# Altium PCB PCB1.PcbDoc
Units mil, origin at the board's own origin, x right, y up, seen from the top; angles counter-clockwise.
Board outline 6000 x 4000 mil, 2 copper layers (Top Layer, Bottom Layer); 25 components, 35 nets, 133 pads, 0 vias.
Unrouted connection lines stored in the file: 61.
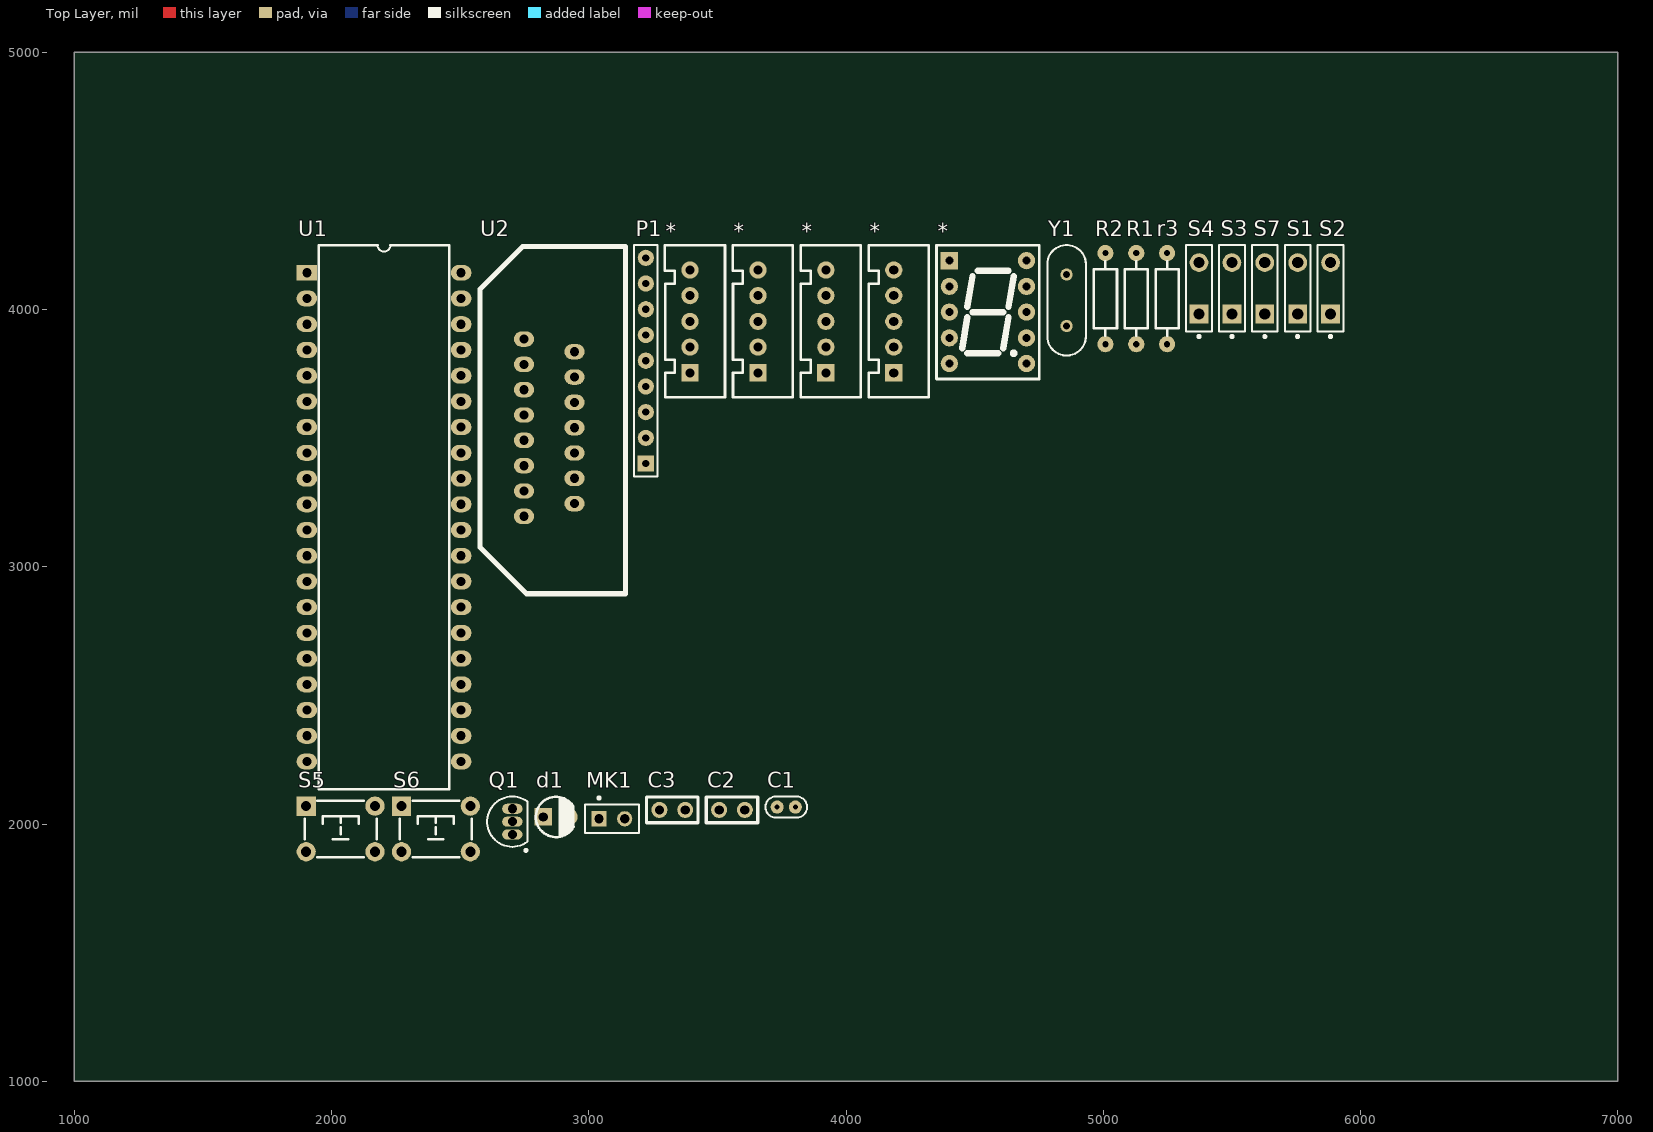
[diagram p0: Top Layer view]
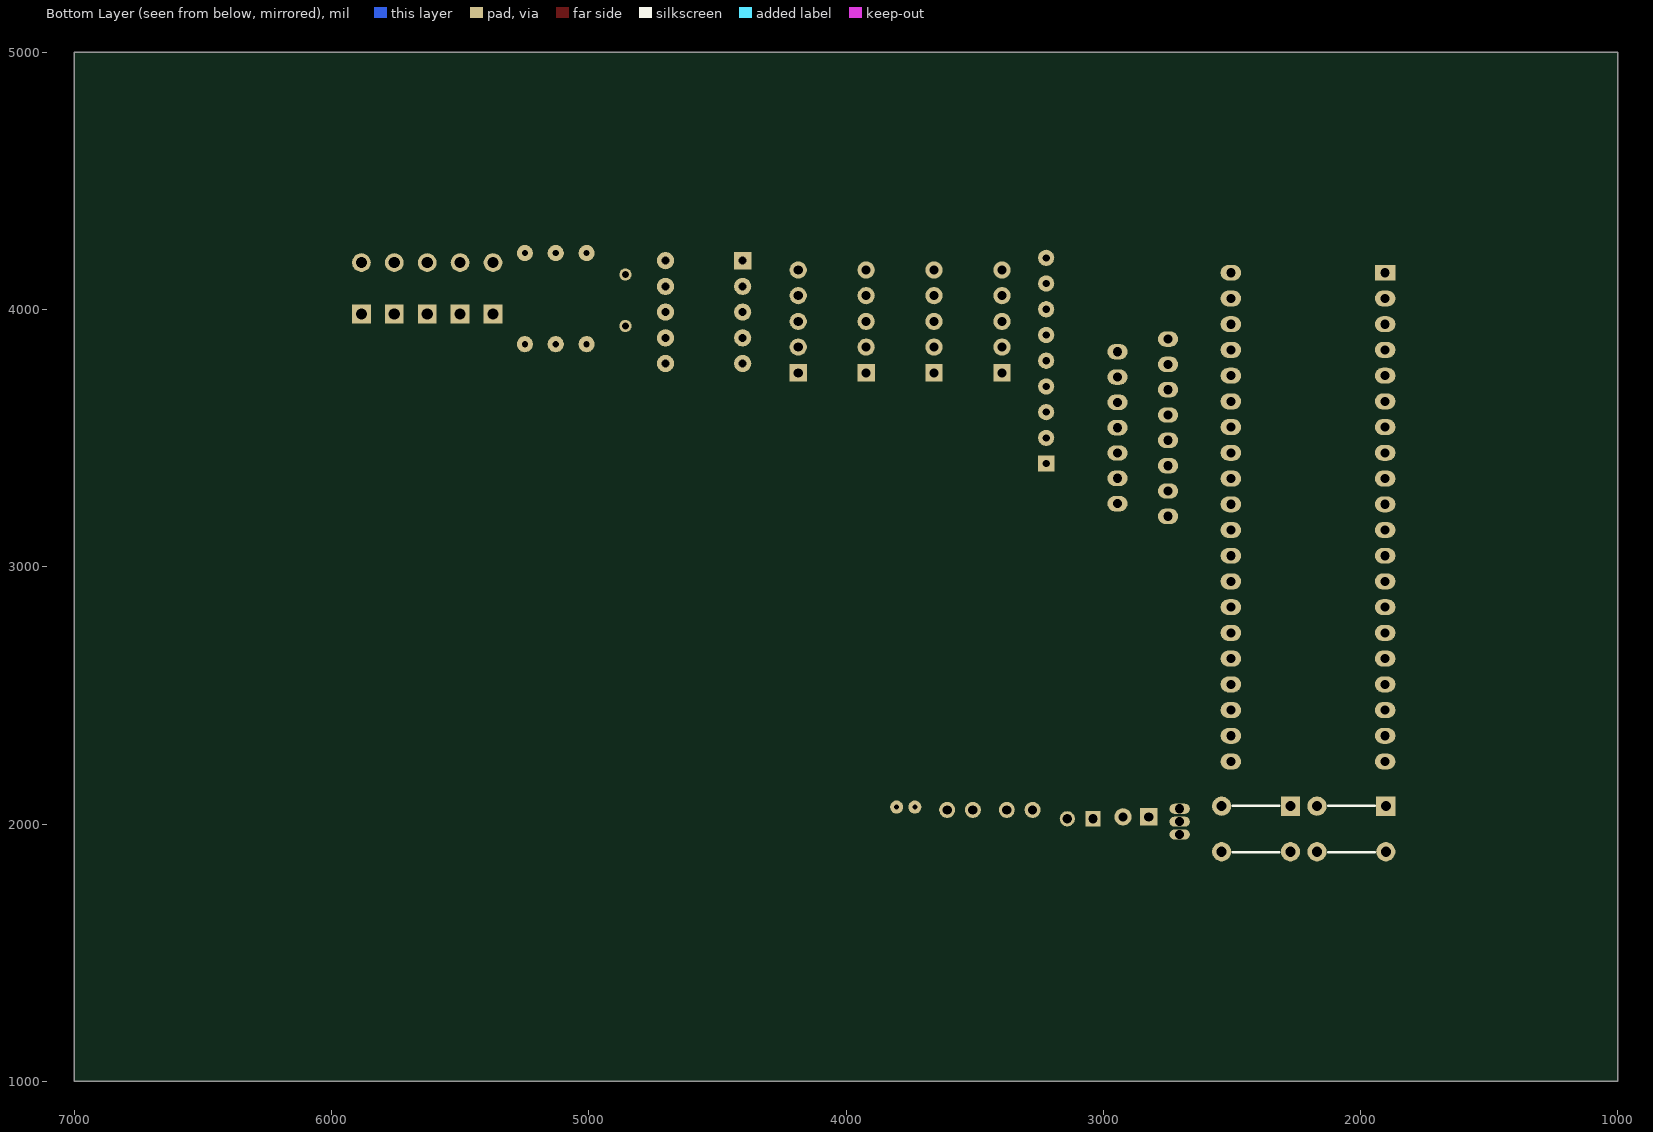
[diagram p1: Bottom Layer view, seen from below]

## Layer stack, top to bottom
Top Solder: solder mask 0.4, Solder Resist, Dk 3.5
Top Layer: signal copper 1.4
Dielectric 1: dielectric 12.6, FR-4, Dk 4.8
Bottom Layer: signal copper 1.4
Bottom Solder: solder mask 0.4, Solder Resist, Dk 3.5

## Board outline
1000,1000 7000,1000 7000,5000 1000,5000

## Design rules (kind name [scope] priority, off if disabled: settings)
Clearance [All] p1: gap=10 ignorepadtopadclearanceinfootprint=FALSE except(0: Arc-Hole Track-Hole SMDPad-Hole THPad-Hole Via-Hole Fill-Hole Poly-Hole Region-Hole Text-Hole)
PolygonConnect [All] p1: connectstyle=Relief reliefconductorwidth=10 reliefentries=4 polygonreliefangle="90 Angle" airgapwidth=10
RoutingVias [All] p1: holewidth=28 width=50 viastyle="Through Hole" minholewidth=28 minwidth=50 maxholewidth=28 maxwidth=50
SolderMaskExpansion [All] p1: expansion=4
Width [All] p1: maxlimit=10 minlimit=10 preferedwidth=10
30 further rules are at their usual default settings.

## Classes and differential pairs
component class 原理图: * C1 C2 C3 d1 MK1 P1 Q1 R1 R2 r3 S1 S2 S3 S4 S5 S6 S7 U1 U2 Y1

## Components (designator, comment, footprint, x,y, rotation, side; value= is the part's Value field where it differs from the comment)
* "METER" XH2.54-LI-5P 3657.68,3953.94 r90 top
* "METER" XH2.54-LI-5P 3393.68,3953.94 r90 top
* "METER" XH2.54-LI-5P 3921.68,3953.94 r90 top
* "LCD" "SMG 0.39-1P" 4551.69,3990 r0 top
* "METER" XH2.54-LI-5P 4185.69,3953.94 r90 top
C1 "Cap Pol1" "CC 1.8*3.6" 3767.74,2065.89 r0 top value=100pF
C2 "30PF" RAD0.1 3506.8,2054.83 r0 top
C3 "30PF" RAD0.1 3274.8,2054.83 r0 top
d1 "led" "LED 3MM-G" 2873.23,2027.88 r0 top
MK1 "Mic1" PIN2 3039.75,2020.27 r0 top
P1 "Header 9" "R SIP9-2.54" 3221.68,3801 r90 top
Q1 "2N3906" TO-92A 2702.77,2009.09 r0 top
R1 "Res2" AXIAL0.4-1/4W 5128.42,4042.34 r90 top value=1K
R2 "Res2" AXIAL0.4-1/4W 5008.42,4042.34 r90 top value=1K
r3 "res" AXIAL0.4-1/4W 5248.42,4042.34 r90 top
S1 "SW-SPST" SPST-2 5755.98,4082.56 r90 top
S2 "SW-SPST" SPST-2 5883.85,4082.56 r90 top
S3 "SW-SPST" SPST-2 5500.23,4082.56 r90 top
S4 "SW-SPST" SPST-2 5372.35,4082.56 r90 top
S5 "4Switch" "TSW DIP-6*6*5" 2035.26,1980.84 r0 top
S6 "4Switch" "TSW DIP-6*6*5" 2405.78,1980.84 r0 top
S7 "SW-SPST" SPST-2 5628.1,4082.56 r90 top
U1 "AT89C52/S52" DIP-40 2208,3117.91 r0 top
U2 "L298" "PCBComponent_1 - duplicate" 2747.84,3885.16 r0 top
Y1 "12MHz" XTAL 4857.55,4036 r90 top

## Footprints (in the part's own frame and the unit in brackets; to place one, negate y for a bottom-side part, rotate by r counter-clockwise, add the part's x,y. Pads: shape width x height; smd on the part's side, far side on the other; paste and mask are expansions set on the pad)
AXIAL0.4-1/4W [mm] "脚距9mm，直径2.3mm        淘宝ID:黄晶宝石"
  round 1.6 hole 0.6: 1(-4.5,0) 2(4.5,0)
  silkscreen extent -3.68,-1.14 3.68,1.14, body extent -4.72,-1.16 4.73,1.16, height 2.32
"CC 1.8*3.6" [mm] "脚距1.8mm直径3.6mm      淘宝ID:黄晶宝石"
  round 1.3 hole 0.5: 1(-0.9,0) 2(0.9,0)
  silkscreen extent -2.05,-1.04 2.05,1.04, body extent -1.8,-0.8 1.8,0.8, height 3.6
DIP-40 [mil] "淘宝ID:黄晶宝石   店铺网址:https://shop463601444.taobao.com"
  rect 80x62 hole 35.43: 1(-304,1025)
  oval 80x62 hole 35.43: 2(-304,925) 3(-304,825) 4(-304,725) 5(-304,625) 6(-304,525) 7(-304,425) 8(-304,325) 9(-304,225) 10(-304,125) 11(-304,25) 12(-304,-75) 13(-304,-175) 14(-304,-275) 15(-304,-375) 16(-304,-475) 17(-304,-575) 18(-304,-675) 19(-304,-775) 20(-304,-875) 21(296,-875) 22(296,-775) 23(296,-675) 24(296,-575) 25(296,-475) 26(296,-375) 27(296,-275) 28(296,-175) 29(296,-75) 30(296,25) 31(296,125) 32(296,225) 33(296,325) 34(296,425) 35(296,525) 36(296,625) 37(296,725) 38(296,825) 39(296,925) 40(296,1025)
  silkscreen extent -258,-982 250,1132, body extent -306,-944 304,1120, height 224
"LED 3MM-G" [mm] "绿色3mm直插LED                                 淘宝ID:黄晶宝石"
  rect 1.7x1.7 hole 0.9: 1(-1.27,0)
  round 1.7 hole 0.9: 2(1.27,0)
  silkscreen extent -2.01,-2 1.72,1.98, body extent -1.95,-1.95 1.64,1.95, height 5.55
"PCBComponent_1 - duplicate" [mm]
  oval 2x1.524 hole 0.91: 0(0,0) 1(5,-1.25) 2(0,-2.5) 3(5,-3.75) 4(0,-5) 5(5,-6.25) 6(0,-7.5) 7(5,-8.75) 8(0,-10) 9(5,-11.25) 10(0,-12.5) 11(5,-13.75) 12(0,-15) 13(5,-16.25) 14(0,-17.5)
  silkscreen extent -4.32,-25.15 10.03,9.14
PIN2 [mm] "Photosensitive Diode; 2 Leads"
  rect 1.5x1.5 hole 0.9: 1(0,0)
  round 1.5 hole 0.9: 2(2.54,0)
  silkscreen extent -1.4,-1.4 3.94,2.17
"R SIP9-2.54" [mm] "22.6mm*5mm*2.2mm(长*宽*厚)     淘宝ID:黄晶宝石"
  rect 1.6x1.6 hole 0.7: 1(-10.16,0)
  round 1.6 hole 0.7: 2(-7.62,0) 3(-5.08,0) 4(-2.54,0) 5(0,0) 6(2.54,0) 7(5.08,0) 8(7.62,0) 9(10.16,0)
  silkscreen extent -11.43,-1.14 11.43,1.14, body extent -11.31,-0.96 11.31,0.96, height 5.2
RAD0.1 [mil]
  round 62 hole 36: 1(0,0) 2(100,0)
  silkscreen extent -50,-50 150,50
"SMG 0.39-1P" [mm] "10*13*7mm(长宽厚)"
  rect 1.7x1.7 hole 0.8: 1(-3.81,5.08)
  round 1.7 hole 0.8: 2(-3.81,2.54) 3(-3.81,0) 4(-3.81,-2.54) 5(-3.81,-5.08) 6(3.81,-5.08) 7(3.81,-2.54) 8(3.81,0) 9(3.81,2.54) 10(3.81,5.08)
  silkscreen extent -5.08,-6.6 5.08,6.6, body extent -5,-6.5 5,6.5, height 7
SPST-2 [mm] "Switch; 2 Leads"
  rect 1.85x1.85 hole 1.1: 1(-2.54,0)
  round 1.85 hole 1.1: 2(2.54,0)
  silkscreen extent -4.89,-1.27 4.28,1.27
TO-92A [mm] "TO, Flat Index; 3 In-Line, Axial Leads; Body Dia. 4.5mm; Leads 0.51 x 0.48 mm (max)"
  oval 2x1 hole 0.9: 1(0,-1.27) 2(0,0) 3(0,1.27)
  silkscreen extent -2.48,-2.95 1.5,2.48, body extent -2.48,-2.5 1.5,2.5, height 6.86
"TSW DIP-6*6*5" [mm] "6*6*5mm        淘宝ID:黄晶宝石"
  rect 1.9x1.9 hole 1: 1(-3.4,2.25)
  round 1.9 hole 1: 2(-3.4,-2.25) 3(3.4,-2.25) 4(3.4,2.25)
  silkscreen extent -3.56,-2.79 3.56,2.79, body extent -4.11,-3 4.11,3, height 4.95
XH2.54-LI-5P [mm] "接插件，5P  淘宝ID:黄晶宝石   店铺网址:https://shop463601444.taobao.com"
  rect 1.7x1.7 hole 0.9: 1(-5.08,0)
  round 1.7 hole 0.9: 2(-2.54,0) 3(0,0) 4(2.54,0) 5(5.08,0)
  silkscreen extent -7.48,-3.45 7.52,2.49, body extent -7.58,-3.3 7.58,2.4, height 7.03
XTAL [mm] "Radial Cap, Thru-Hole; 2 Leads; 0.2 in Pin Spacing"
  round 1.2 hole 0.7: 1(-2.54,0) 2(2.54,0)
  silkscreen extent -5.46,-1.91 5.46,1.91, body extent -5.33,-2.05 5.33,2.05, height 3.22

## Part data
C1: "Polarized Capacitor (Radial)", LatestRevisionDate=17-Jul-2002, LatestRevisionNote="Re-released for DXP Platform.", PackageReference=RB7.6-15, Published=8-Jun-2000, Publisher="Altium Limited"
C2 C3: library part CAP, "Capacitor"
MK1: "Microphone", LatestRevisionDate=17-Jul-2002, LatestRevisionNote="Re-released for DXP Platform.", PackageReference=PIN2, Published=24-Mar-1999, Publisher="Altium Limited"
P1: "Header, 9-Pin", LatestRevisionDate=17-Jul-2002, LatestRevisionNote="Re-released for DXP Platform.", Publisher="Altium Limited"
Q1: "PNP General Purpose Amplifier", PackageDocument=Sep-1998, Code_JEDEC=TO-92A, ComponentLink1Description="Manufacturer Link", ComponentLink1URL=http://www.fairchildsemi.com/, ComponentLink2Description=Datasheet, ComponentLink2URL=http://www.fairchildsemi.com/ds/2N%2F2N3906.pdf, DatasheetDocument=1997, LatestRevisionDate=15-Jan-2003, LatestRevisionNote="PCB Footprint 'BCY-W3/D4.7' replaced", PackageReference=TO-92A, Published=8-Jun-2000, Publisher="Altium Limited"
R1 R2: "Resistor", LatestRevisionDate=17-Jul-2002, LatestRevisionNote="Re-released for DXP Platform.", PackageReference=AXIAL-0.4, Published=8-Jun-2000, Publisher="Altium Limited"
S1 S2 S3 S4 S7: "Single-Pole, Single-Throw Switch", LatestRevisionDate=17-Jul-2002, LatestRevisionNote="Re-released for DXP Platform.", PackageReference=SPST-2, Published=24-Mar-1999, Publisher="Altium Limited"
U1: library part AT89C51
Y1: library part CRYSTAL, "Crystal"

## Nets (pads, with @x,y where several pads share a name; then routed paths per layer and width w, separated by ;. In a path a pad name is that pad's centre, name@x,y a point inside that pad or via, vN(x,y) a via of type N, cw(c..) or ccw(c..) an arc to the next point about the centre after c; other vN are vias at no path point)
GND: *.2@3393.68,3853.94 *.2@3657.68,3853.94 *.2@3921.68,3853.94 *.2@4185.69,3853.94 C2.2 C3.2 MK1.1 R1.2 r3.2 S1.2 S2.2 S3.2 S4.2 S5.2 S5.3 S6.1 S6.4 U1.9 U1.20 U2.4
Net*_1: *.1@4401.69,4190 U1.24
Net*_2: *.2@4401.69,4090 U1.23
Net*_3: *.3@4401.69,3990 U1.22
Net*_4: *.4@3657.68,4053.94 *.4@4185.69,4053.94 U2.0
Net*_5: *.5@3657.68,4153.94 *.5@4185.69,4153.94 U2.1
NetC1_1: C1.1 R1.1
NetC2_1: C2.1 U1.18 Y1.1
NetC3_1: C3.1 U1.19 Y1.2
Netd1_1: d1.1 MK1.2 Q1.3
Netd1_2: d1.2 r3.1
NetP1_2: P1.2 U1.39
NetP1_3: P1.3 U1.38
NetP1_4: P1.4 U1.37
NetP1_5: P1.5 U1.36
NetP1_6: P1.6 U1.35
NetP1_7: P1.7 U1.34
NetP1_8: P1.8 U1.33
NetP1_9: P1.9 U1.32
NetQ1_2: Q1.2 R2.2
NetR2_1: R2.1 U1.8
NetS1_1: S1.1 U1.17
NetS2_1: S2.1 U1.16
NetS3_1: S3.1 U1.15
NetS4_1: S4.1 U1.14
NetS5_1: S5.1 S5.4 U1.13
NetS7_1: S7.1 U2.14
NetU1_1: U1.1 U2.8
NetU1_2: U1.2 U2.7
NetU1_3: U1.3 U2.12
NetU1_4: U1.4 U2.11
NetU1_5: U1.5 U2.10
NetU1_6: U1.6 U2.9
VCC: C1.2 P1.1 Q1.1 S6.2 S6.3 U1.40 U2.5 U2.6 U2.13
信号源: S7.2
pads on no net: *.1@3393.68,3753.94 *.1@3657.68,3753.94 *.1@3921.68,3753.94 *.1@4185.69,3753.94 *.3@3393.68,3953.94 *.3@3657.68,3953.94 *.3@3921.68,3953.94 *.3@4185.69,3953.94 *.4@3393.68,4053.94 *.4@3921.68,4053.94 *.4@4401.69,3890 *.5@3393.68,4153.94 *.5@3921.68,4153.94 *.5@4401.69,3790 *.6 *.7 *.8 *.9 *.10 U1.7 U1.10 U1.11 U1.12 U1.21 U1.25 U1.26 U1.27 U1.28 U1.29 U1.30 U1.31 U2.2 U2.3